# Altium PCB imx6ul.PcbDoc
Units mil, origin at the board's own origin, x right, y up, seen from the top; angles counter-clockwise.
Board outline 6000 x 4000 mil, 2 copper layers (Top Layer, Bottom Layer); 184 components, 209 nets, 602 pads, 0 vias.
Unrouted connection lines stored in the file: 404.
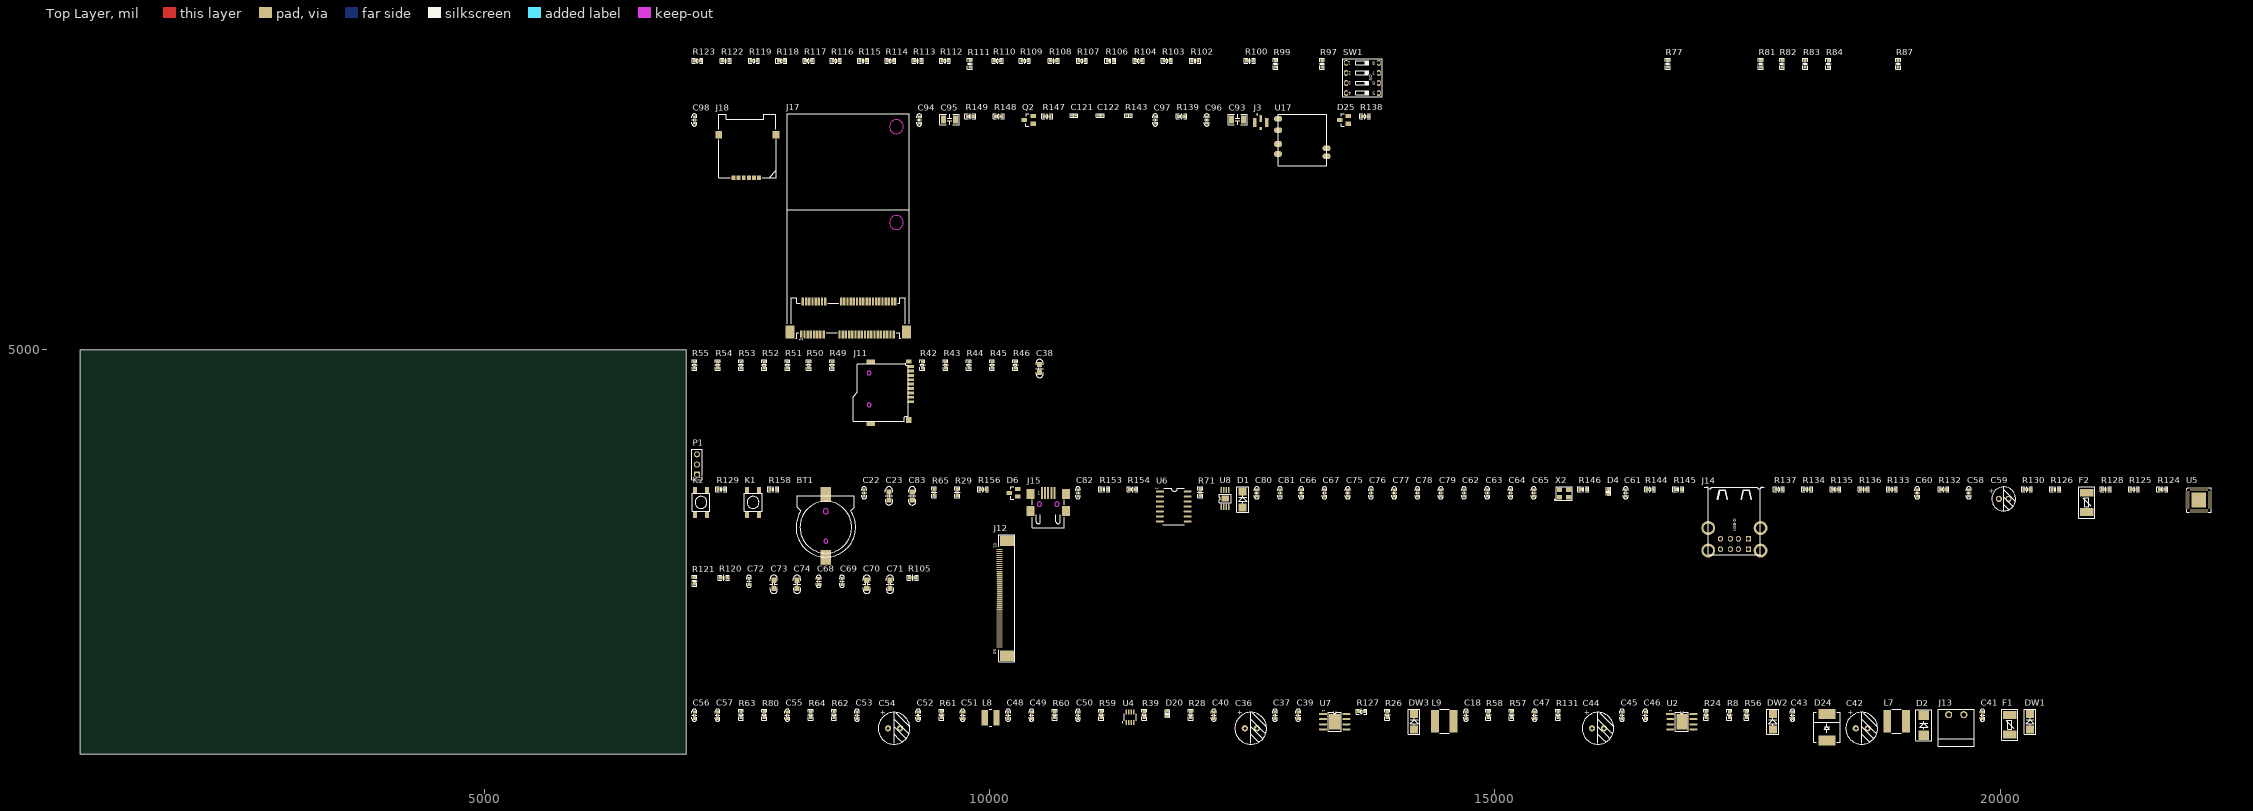
[diagram p0: Top Layer view]
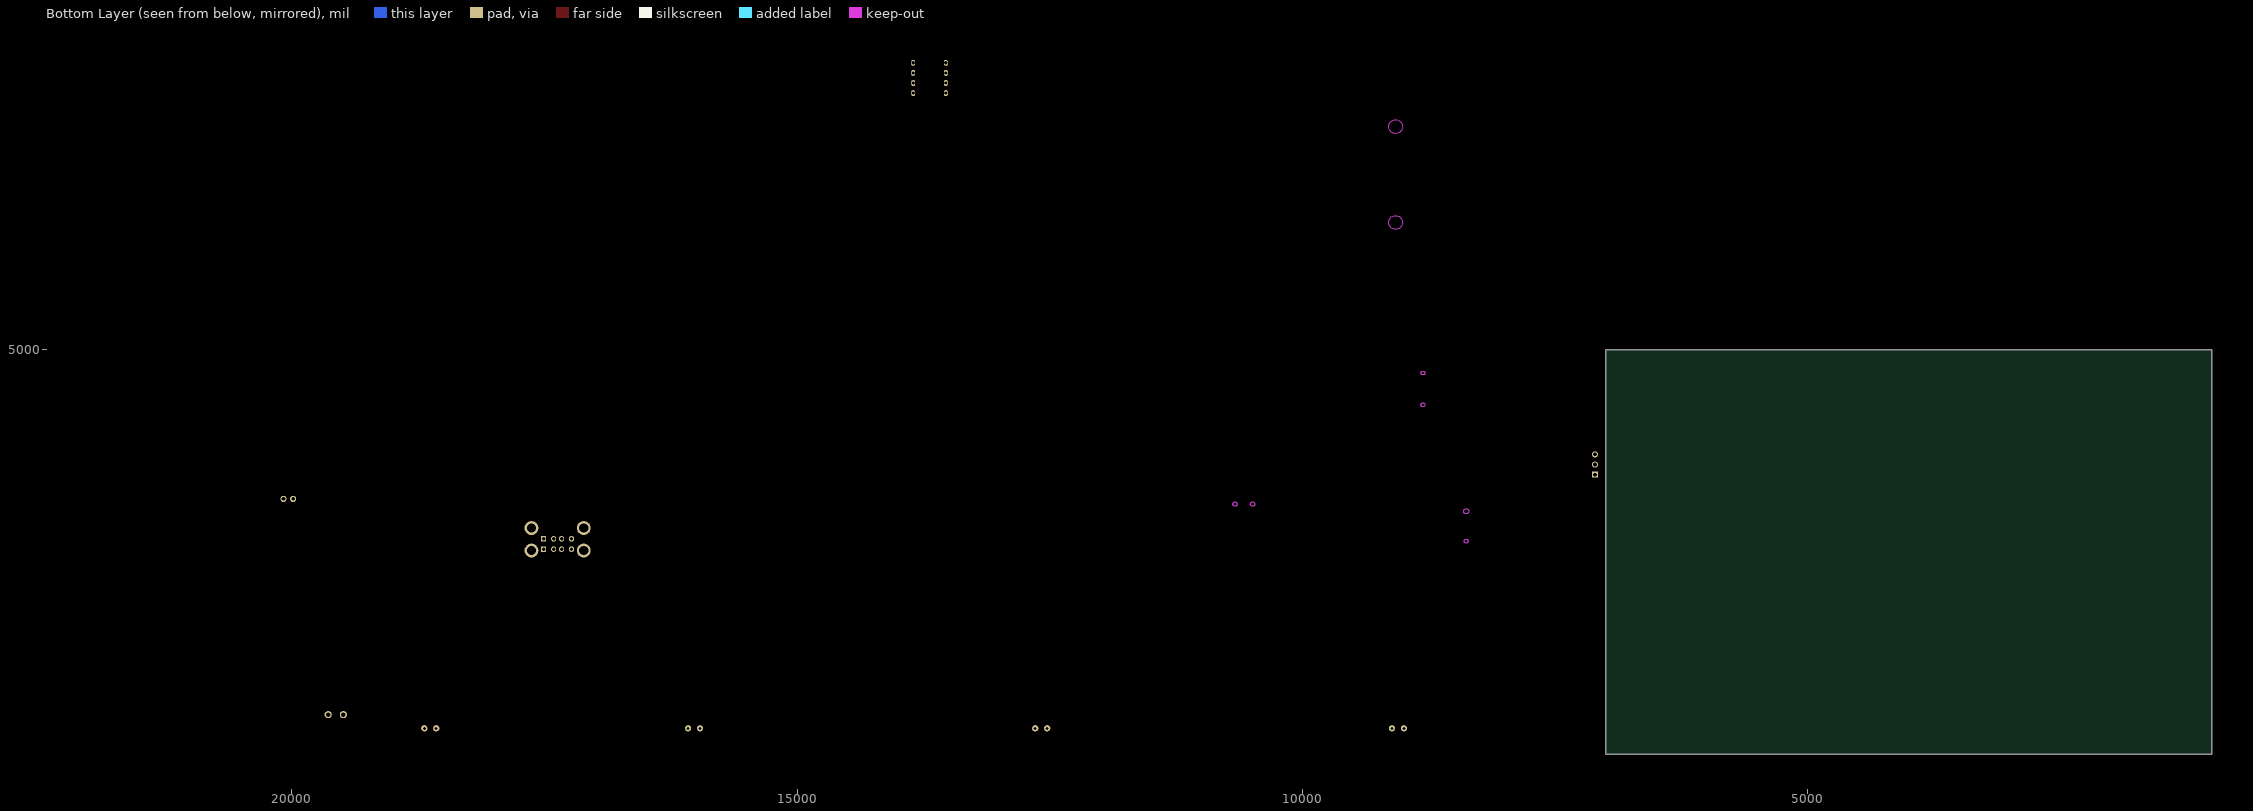
[diagram p1: Bottom Layer view, seen from below]

## Layer stack, top to bottom
Top Layer: signal copper 1.4
Dielectric: dielectric 12.6, FR-4, Dk 4.8
Bottom Layer: signal copper 1.4

## Board outline
1000,1000 7000,1000 7000,5000 1000,5000

## Design rules (kind name [scope] priority, off if disabled: settings)
Clearance [All] p1: gap=10
ComponentClearance [All] p1: gap=10 collisioncheckmode=3 verticalgap=10
DiffPairsRouting [All] p1: maxlimit=10 minlimit=10 mostfreqgap=10 maxuncoupledlength=500
PolygonConnect [All] p1: connectstyle=Relief reliefconductorwidth=10 reliefentries=4 polygonreliefangle="90 Angle"
RoomDefinition 2.POWER [InComponentClass('2.POWER')] p1: confinementstyle=ConfineIn formatcopy=TRUE lockcomponents=FALSE outline 7045,1065 20400,1065 20400,1555 7045,1555
RoomDefinition 4.CAMERA-RGB [InComponentClass('4.CAMERA-RGB')] p2: confinementstyle=ConfineIn formatcopy=TRUE lockcomponents=FALSE outline 7045,1505 9695,1505 9695,2880 7045,2880
RoomDefinition 5.USB-RTC-RST [InComponentClass('5.USB-RTC-RST')] p3: confinementstyle=ConfineIn formatcopy=TRUE lockcomponents=FALSE outline 7045,2860 22105,2860 22105,3755 7045,3755
RoomDefinition 6.232-485-CAN-DB [InComponentClass('6.232-485-CAN-DB')] p4: confinementstyle=ConfineIn formatcopy=TRUE lockcomponents=FALSE outline 7045,3705 7165,3705 7165,4125 7045,4125
RoomDefinition 7.AUDIO-TFCARD [InComponentClass('7.AUDIO-TFCARD')] p5: confinementstyle=ConfineIn formatcopy=TRUE lockcomponents=FALSE outline 7045,4175 20810,4175 20810,5015 7045,5015
RoomDefinition 8.PCIE-WIFI [InComponentClass('8.PCIE-WIFI')] p6: confinementstyle=ConfineIn formatcopy=TRUE lockcomponents=FALSE outline 7045,5065 13895,5065 13895,7445 7045,7445
RoomDefinition 9.BOOT [InComponentClass('9.BOOT')] p7: confinementstyle=ConfineIn formatcopy=TRUE lockcomponents=FALSE outline 7045,7490 19380,7490 19380,7995 7045,7995
RoomDefinition 1.CONNECTOR [InComponentClass('1.CONNECTOR')] p8: confinementstyle=ConfineIn formatcopy=TRUE lockcomponents=FALSE outline 0,0 2000,0 2000,1000 0,1000
RoutingVias [All] p1: holewidth=28 width=50 viastyle="Through Hole" minholewidth=28 minwidth=50 maxholewidth=28 maxwidth=50
SolderMaskExpansion [All] p1: expansion=4
TestPointUsage [All] p1: valid=0 allowmultiple=FALSE
Testpoint [All] p1: side=15 testpointundercomponent=TRUE minsize=40 maxsize=100 preferedsize=60 minholesize=0 maxholesize=40 preferedholesize=32 testpointgrid=1 style=1023 order=0123456789
Width [All] p1: maxlimit=10 minlimit=10 preferedwidth=10
17 further rules are at their usual default settings.

## Classes and differential pairs
component class 7.AUDIO-TFCARD: C38 J11 R42 R43 R44 R45 R46 R49 R50 R51 R52 R53 R54 R55
component class 9.BOOT: R77 R81 R82 R83 R84 R87 R97 R99 R100 R102 R103 R104 R106 R107 R108 R109 R110 R111 R112 R113 R114 R115 R116 R117 R118 R119 R122 R123 SW1
component class 8.PCIE-WIFI: C93 C94 C95 C96 C97 C98 C121 C122 D25 J3 J17 J18 Q2 R138 R139 R143 R147 R148 R149 U17
component class 6.232-485-CAN-DB: P1
component class 5.USB-RTC-RST: BT1 C22 C23 C58 C59 C60 C61 C62 C63 C64 C65 C66 C67 C75 C76 C77 C78 C79 C80 C81 C82 C83 D1 D4 D6 F2 J14 J15 K1 K2 R29 R65 R71 R124 R125 R126 R128 R129 R130 R132 R133 R134 R135 R136 R137 R144 R145 R146 R153 R154 R156 R158 U5 U6 U8 X2
component class 4.CAMERA-RGB: C68 C69 C70 C71 C72 C73 C74 J12 R105 R120 R121
component class 2.POWER: C18 C36 C37 C39 C40 C41 C42 C43 C44 C45 C46 C47 C48 C49 C50 C51 C52 C53 C54 C55 C56 C57 D2 D20 D24 DW1 DW2 DW3 F1 J13 L7 L8 L9 R8 R24 R26 R28 R39 R56 R57 R58 R59 R60 R61 R62 R63 R64 R80 R127 R131 U2 U4 U7
component class 1.CONNECTOR: J1
differential pair USB_PORT4: +USB_PORT4_P -USB_PORT4_N
differential pair USB_PORT3: +USB_PORT3_P -USB_PORT3_N
differential pair USB_PORT2: +USB_PORT2_P -USB_PORT2_N
differential pair USB_PORT1: +USB_PORT1_P -USB_PORT1_N
differential pair USB_OTG: +USB_OTG_P -USB_OTG_N
differential pair USB_OTG2: +USB_OTG2_P -USB_OTG2_N

## Components (designator, comment, footprint, x,y, rotation, side; value= is the part's Value field where it differs from the comment)
BT1 "" CR1220 8380,3245 r90 top
C18 "0.01uF" 0603C 14715,1385 r0 top
C22 "0.1uF" 0603C 8760,3585 r0 top
C23 "22uF" 0805C 9005,3595 r0 top
C36 "470uF/16V" RAD-3/8 12585,1255 r0 top
C37 "0.01uF" 0603C 12825,1385 r0 top
C38 "22uF" 0805C 10495,4855 r0 top
C39 "0.1uF" 0603C 13055,1385 r0 top
C40 "0.01uF" 0603C 12220,1385 r0 top
C41 "0.01uF" 0603C 19825,1385 r0 top
C42 "100uF/50V" RAD-3/8 18630,1255 r0 top
C43 "0.1uF" 0603C 17945,1385 r0 top
C44 "470uF/16V" RAD-3/8 16020,1255 r0 top
C45 "0.01uF" 0603C 16260,1385 r0 top
C46 "0.1uF" 0603C 16490,1385 r0 top
C47 "0.01uF" 0603C 15395,1385 r0 top
C48 "10uF" 0603C 10185,1385 r0 top
C49 "0.1uF" 0603C 10415,1385 r0 top
C50 "0.1uF" 0603C 10875,1385 r0 top
C51 "0.01uF" 0603C 9735,1385 r0 top
C52 "10pF" 0603C 9295,1385 r0 top
C53 "0.1uF" 0603C 8690,1385 r0 top
C54 "470uF/16V" RAD-3/8 9055,1255 r0 top
C55 "0.1uF" 0603C 8000,1385 r0 top
C56 "0.1uF" 0603C 7080,1385 r0 top
C57 "0.1uF" 0603C 7310,1385 r0 top
C58 "0.1uF" 0603C 19690,3585 r0 top
C59 "220uF/16V" RAD-3/6 20035,3525 r0 top
C60 "0.1uF" 0603C 19180,3585 r0 top
C61 "0.1uF" 0603C 16295,3585 r0 top
C62 "4.7uF" 0603C 14695,3585 r0 top
C63 "0.1uF" 0603C 14925,3585 r0 top
C64 "4.7uF" 0603C 15155,3585 r0 top
C65 "0.1uF" 0603C 15385,3585 r0 top
C66 "18pF" 0603C 13085,3585 r0 top
C67 "18pF" 0603C 13315,3585 r0 top
C68 "22pF" 0603C 8310,2710 r0 top
C69 "0.1uF" 0603C 8540,2710 r0 top
C70 "22uF" 0805C 8785,2720 r0 top
C71 "22uF" 0805C 9015,2720 r0 top
C72 "0.1uF" 0603C 7620,2710 r0 top
C73 "22uF" 0805C 7865,2720 r0 top
C74 "22uF" 0805C 8095,2720 r0 top
C75 "0.1uF" 0603C 13545,3585 r0 top
C76 "0.1uF" 0603C 13775,3585 r0 top
C77 "0.1uF" 0603C 14005,3585 r0 top
C78 "0.1uF" 0603C 14235,3585 r0 top
C79 "4.7uF" 0603C 14465,3585 r0 top
C80 "1uF" 0603C 12645,3585 r0 top
C81 "1uF" 0603C 12875,3585 r0 top
C82 "0.1uF" 0603C 10875,3585 r0 top
C83 "22uF" 0805C 9235,3595 r0 top
C93 "47uF/NC" 1206C 12395,7280 r0 top
C94 "0.1uF" 0603C 9305,7275 r0 top
C95 "47uF" 1206C 9545,7280 r0 top
C96 "0.1uF/NC" 0603C 12150,7275 r0 top
C97 "1uF/NC" 0603C 11640,7275 r0 top
C98 "0.1uF" 0603C 7080,7275 r0 top
C121 "10PF(NC)" 0402C 10835,7320 r90 top
C122 "10PF(NC)" 0402C 11095,7320 r90 top
D1 "SS24(NC)" SMA 12505,3520 r90 top
D2 "SMBJ30CA" SMBJ 19245,1385 r90 top
D4 "发光二极管" 0603D 16125,3600 r0 top
D6 "BAT54C" SOT-23 10295,3625 r0 top
D20 "发光二极管" 0603D 11760,1400 r0 top
D24 "SMLJ60S6" DO214AB_SM 18285,1265 r0 top
D25 "APM2301CA/NC" SOT-23 13565,7315 r0 top
DW1 "SS24" SMA 20295,1320 r90 top
DW2 "SS24" SMA 17750,1320 r90 top
DW3 "SS24" SMA 14200,1320 r90 top
F1 "2A FUSE" 1812F 20095,1195 r90 top
F2 "1A  FUSE" 1812F 20855,3395 r90 top
J3 "IPEX/NC" IPEX 12685,7290 r0 top
J11 "TF-CAD" TF-CARD 9150,4545 r0 top
J12 "FPC50" FPC50-0.5-UP 10100,2060 r90 top
J13 "CON2X1" "IDC2X1 3.81" 19565,1245 r0 top
J14 "USB-D" USB-D 17370,3125 r0 top
J15 "USB_AB" USB-AB 10580,3495 r0 top
J17 "Mini PCI Express" MINI-PCIE 8110,5315 r0 top
J18 "MICRO-SIM" MACRO-SIM 7320,7130 r0 top
K1 "按键" SS-SPB-4.5 7660,3490 r90 top
K2 "按键" SS-SPB-4.5 7145,3490 r90 top
L7 "15uH" SDS606028S 18975,1325 r0 top
L8 "2.2uH" SDRH0420 10010,1360 r0 top
L9 "15uH" SDS606028S 14500,1325 r0 top
P1 "Header 3" HDR1X3 7105,3765 r90 top
Q2 "9013/NC" SOT-23 10445,7315 r0 top
R8 "0R" 0603R 17320,1390 r0 top
R24 "0R/NC" 0603R 17090,1390 r0 top
R26 "44.2K 1%" 0603R 13935,1390 r0 top
R28 "10K 1%" 0603R 11990,1390 r0 top
R29 "0R" 0603R 9680,3590 r0 top
R39 "10K" 0603R 11530,1390 r0 top
R42 "10K" 0603R 9335,4850 r0 top
R43 "10K" 0603R 9565,4850 r0 top
R44 "10K" 0603R 9795,4850 r0 top
R45 "10K" 0603R 10025,4850 r0 top
R46 "10K" 0603R 10255,4850 r0 top
R49 "22R" 0603R 8440,4850 r0 top
R50 "22R" 0603R 8210,4850 r0 top
R51 "22R" 0603R 8000,4850 r0 top
R52 "22R" 0603R 7770,4850 r0 top
R53 "10K" 0603R 7540,4850 r0 top
R54 "22R" 0603R 7310,4850 r0 top
R55 "22R" 0603R 7080,4850 r0 top
R56 "51.1K 1%" 0603R 17490,1390 r0 top
R57 "10K 1%" 0603R 15165,1390 r0 top
R58 "10K" 0603R 14935,1390 r0 top
R59 "20R" 0603R 11105,1390 r0 top
R60 "100K" 0603R 10645,1390 r0 top
R61 "40.2K 1%" 0603R 9525,1390 r0 top
R62 "24K 1%" 0603R 8460,1390 r0 top
R63 "13K 1%" 0603R 7540,1390 r0 top
R64 "0R/NC" 0603R 8230,1390 r0 top
R65 "0R" 0603R 9450,3590 r0 top
R71 "10K(NC)" 0603R 12085,3590 r0 top
R77 "10K" 0603R 16710,7830 r0 top
R80 "0R/NC" 0603R 7770,1390 r0 top
R81 "1K" 0603R 17630,7830 r0 top
R82 "1K" 0603R 17840,7830 r0 top
R83 "1K" 0603R 18070,7830 r0 top
R84 "1K" 0603R 18300,7830 r0 top
R87 "1K" 0603R 18990,7830 r0 top
R97 "10K" 0603R 13290,7830 r0 top
R99 "10K" 0603R 12830,7830 r0 top
R100 "10K" 0603R 12575,7860 r90 top
R102 "10K" 0603R 12035,7860 r90 top
R103 "10K" 0603R 11755,7860 r90 top
R104 "10K" 0603R 11475,7860 r90 top
R105 "22R" 0603R 9240,2745 r90 top
R106 "10K" 0603R 11195,7860 r90 top
R107 "10K" 0603R 10915,7860 r90 top
R108 "10K" 0603R 10635,7860 r90 top
R109 "10K" 0603R 10350,7860 r90 top
R110 "10K" 0603R 10080,7860 r90 top
R111 "10K" 0603R 9805,7830 r0 top
R112 "10K" 0603R 9560,7860 r90 top
R113 "10K" 0603R 9290,7860 r90 top
R114 "10K" 0603R 9020,7860 r90 top
R115 "10K" 0603R 8750,7860 r90 top
R116 "10K" 0603R 8480,7860 r90 top
R117 "10K" 0603R 8210,7860 r90 top
R118 "10K" 0603R 7940,7860 r90 top
R119 "10K" 0603R 7670,7860 r90 top
R120 "0R/NC" 0603R 7370,2745 r90 top
R121 "0R/NC" 0603R 7080,2715 r0 top
R122 "10K" 0603R 7390,7860 r90 top
R123 "10K" 0603R 7110,7860 r90 top
R124 "0R" 0603R 21605,3620 r90 top
R125 "10K" 0603R 21325,3620 r90 top
R126 "0R" 0603R 20545,3620 r90 top
R127 "1K" 0603R 13680,1420 r90 top
R128 "10K" 0603R 21045,3620 r90 top
R129 "510R" 0603R 7345,3620 r90 top
R130 "10K" 0603R 20265,3620 r90 top
R131 "10K" 0603R 15625,1390 r0 top
R132 "10K" 0603R 19440,3620 r90 top
R133 "100K" 0603R 18930,3620 r90 top
R134 "100K" 0603R 18090,3620 r90 top
R135 "100K" 0603R 18370,3620 r90 top
R136 "100K" 0603R 18650,3620 r90 top
R137 "12K 1%" 0603R 17810,3620 r90 top
R138 "0R(NC)" 0603R 13715,7310 r90 top
R139 "10K/NC" 0603R 11900,7310 r90 top
R143 "0R(NC)" 0402R 11375,7320 r90 top
R144 "1K" 0603R 16535,3620 r90 top
R145 "100K" 0603R 16815,3620 r90 top
R146 "1M" 0603R 15875,3620 r90 top
R147 "1K/NC" 0603R 10570,7310 r90 top
R148 "2K/NC" 0603R 10090,7310 r90 top
R149 "4.7K/NC" 0603R 9810,7310 r90 top
R153 "10K" 0603R 11135,3620 r90 top
R154 "10K" 0603R 11415,3620 r90 top
R156 "0R(NC)" 0603R 9935,3620 r90 top
R158 "510R" 0603R 7860,3620 r90 top
SW1 "DHN-04" SW-4P 13690,7690 r0 top
U2 "ACT4070BYH" SOIC8DN-1.27 16735,1395 r0 top
U4 "MP1498DJ" TSOT23-8 11390,1365 r0 top
U5 "USB2514BI" QFN-36 21965,3515 r0 top
U6 "RX8025-SA" SOP14-1.27 11685,3600 r0 top
U7 "ACT4070BYH" SOIC8DN-1.27 13300,1395 r0 top
U8 "TPS2061DGN(NC)" MSOP-8 12330,3530 r90 top
U17 "RTL8188EUS/NC" "RTL8188EUS 13*12.2" 13335,6820 r0 top
X2 "24M" OSC4-3225 15640,3540 r0 top

## Footprints (in the part's own frame and the unit in brackets; to place one, negate y for a bottom-side part, rotate by r counter-clockwise, add the part's x,y. Pads: shape width x height; smd on the part's side, far side on the other; paste and mask are expansions set on the pad)
0402C [mm]
  rect 0.53x0.55 smd: 1(0,0.5) 2(0,-0.5)
  silkscreen extent -0.46,-0.97 0.46,0.97
0402R [mm]
  rect 0.53x0.55 smd: 1(0,0.5) 2(0,-0.5)
  silkscreen extent -0.46,-0.97 0.46,0.97
0603C [mil]
  rect 31.5x30 smd: 1(-1.02,29.52) 2(-1.02,-30.48)
  silkscreen extent -25,-61 23,60
0603D [mil]
  rect 35.43x30 smd: A(0,-30) K(0,30)
  silkscreen extent -24,-40 24,39
0603R [mil]
  rect 31.5x30 smd: 1(0.04,30.32) 2(0.04,-29.68)
  silkscreen extent -28,-53 28,54
0805C [mil]
  rect 50x50 smd: 1(0,0) 2(0,-80)
  silkscreen extent -39,-131 35,51
1206C [mm]
  rect 1.2x2 smd: 1(0,0) 2(3,0)
  silkscreen extent -0.9,-1.3 3.9,1.3
1812F [mm]
  rect 2x3.4 smd: 1(0,0) 2(4.85,0)
  silkscreen extent -1.5,-2.03 6.35,2.03
CR1220 [mm]
  rect 3.8x2.6 smd: 1(8.23,0) 2(-7.57,0)
  Keep-Out Layer circle w0.1: c4,0 r0.65
  Keep-Out Layer circle w0.1: c-3.5,0 r0.5
  silkscreen extent -7.5,-7.5 7.94,7.5
DO214AB_SM [mil]
  rect 170x100 smd: A(0,-130) C(0,130)
  silkscreen extent -130,-147 130,147
FPC50-0.5-UP [mm]
  oval 0.3x1.5 smd: 1(24.5,0) 2(24,0) 3(23.5,0) 4(23,0) 5(22.5,0) 6(22,0) 7(21.5,0) 8(21,0) 9(20.5,0) 10(20,0) 11(19.5,0) 12(19,0) 13(18.5,0) 14(18,0) 15(17.5,0) 16(17,0) 17(16.5,0) 18(16,0) 19(15.5,0) 20(15,0) 21(14.5,0) 22(14,0) 23(13.5,0) 24(13,0) 25(12.5,0) 26(12,0) 27(11.5,0) 28(11,0) 29(10.5,0) 30(10,0) 31(9.5,0) 32(9,0) 33(8.5,0) 34(8,0) 35(7.5,0) 36(7,0) 37(6.5,0) 38(6,0) 39(5.5,0) 40(5,0) 41(4.5,0) 42(4,0) 43(3.5,0) 44(3,0) 45(2.5,0) 46(2,0) 47(1.5,0) 48(1,0) 49(0.5,0)
  rect 0.3x1.5 smd: 50(0,0)
  rect 2.7x3.5 smd: BO1(-2.2,-1.825) BO2(26.7,-1.812)
  silkscreen extent -3.7,-3.82 28.2,0.18
HDR1X3 [mm] "Connector; Header; 3 Position"
  rect 1.5x1.5 hole 0.9: 1(0,0)
  round 1.5 hole 0.9: 2(2.54,0) 3(5.08,0)
  silkscreen extent -1.27,-1.27 6.35,1.27
"IDC2X1 3.81" [mm]
  round 1.8 hole 1.1: 1(-1.905,3.683) 2(1.905,3.683)
  silkscreen extent -4.56,-4.32 4.56,4.98
IPEX [mm]
  rect 0.6x1.8 smd: 1(0,0)
  rect 0.9x2.2 smd: 2(-1.5,-1) 3(1.5,-1)
  rect 0.6x0.8 smd: 4(0,-2.5)
  silkscreen extent -0.99,0.89 -0.79,1.09
MACRO-SIM [mm]
  rect 1x1.2 smd: 1(3.75,-10.86) 2(5.02,-10.86) 3(6.29,-10.86) 4(7.56,-10.86) 5(8.83,-10.86) 6(10.1,-10.86)
  rect 1.7x1.9 smd: ""(0,-0.01) ""(14.4,-0.01)
  silkscreen extent 0,-10.86 14.43,5.1
MINI-PCIE [mm]
  rect 0.6x2 smd: 1(0.7,-4.1) 2(1.1,4.1) 3(1.5,-4.1) 4(1.9,4.1) 5(2.3,-4.1) 6(2.7,4.1) 7(3.1,-4.1) 8(3.5,4.1) 9(3.9,-4.1) 10(4.3,4.1) 11(4.7,-4.1) 12(5.1,4.1) 13(5.5,-4.1) 14(5.9,4.1) 15(6.3,-4.1) 16(6.7,4.1) 17(10.3,-4.1) 18(10.7,4.1) 19(11.1,-4.1) 20(11.5,4.1) 21(11.9,-4.1) 22(12.3,4.1) 23(12.7,-4.1) 24(13.1,4.1) 25(13.5,-4.1) 26(13.9,4.1) 27(14.3,-4.1) 28(14.7,4.1) 29(15.1,-4.1) 30(15.5,4.1) 31(15.9,-4.1) 32(16.3,4.1) 33(16.7,-4.1) 34(17.1,4.1) 35(17.5,-4.1) 36(17.9,4.1) 37(18.3,-4.1) 38(18.7,4.1) 39(19.1,-4.1) 40(19.5,4.1) 41(19.9,-4.1) 42(20.3,4.1) 43(20.7,-4.1) 44(21.1,4.1) 45(21.5,-4.1) 46(21.9,4.1) 47(22.3,-4.1) 48(22.7,4.1) 49(23.1,-4.1) 50(23.5,4.1) 51(23.9,-4.1) 52(24.3,4.1)
  rect 2.3x3.2 smd: 53(-2.15,-3.5) 54(27.15,-3.5)
  rrect70% 0x0 hole 1.6: 55(0,0)
  rrect70% 0x0 hole 1.1: 56(25,0)
  Keep-Out Layer circle w0.203: c24.6,48.1 r1.75
  Keep-Out Layer circle w0.203: c24.6,24 r1.75
  silkscreen extent -2.8,-5.1 27.8,51.3
MSOP-8 [mm]
  rect 1.6x0.4 smd: 1(-2.1,0.975) 2(-2.1,0.325) 3(-2.1,-0.325) 4(-2.1,-0.975) 5(2.1,-0.975) 6(2.1,-0.325) 7(2.1,0.325) 8(2.1,0.975)
  rect 1.57x1.89 smd: 9(0,0)
  silkscreen extent -1.1,-1.5 1.1,1.5
OSC4-3225 [mm]
  rect 1.3x1.1 smd: 1(0,0) 2(2.3,0) 3(2.3,1.9) 4(0,1.9)
  silkscreen extent -1.29,-0.76 3.17,2.67
QFN-36 [mm]
  rect 1x0.28 smd: 1(-2.777,2) 2(-2.777,1.5) 3(-2.777,1) 4(-2.777,0.5) 5(-2.777,0) 6(-2.777,-0.5) 7(-2.777,-1) 8(-2.777,-1.5) 9(-2.777,-2) 19(2.823,-2) 20(2.823,-1.5) 21(2.823,-1) 22(2.823,-0.5) 23(2.823,0) 24(2.823,0.5) 25(2.823,1) 26(2.823,1.5) 27(2.823,2)
  rect 0.28x1 smd: 10(-1.977,-2.8) 11(-1.477,-2.8) 12(-0.977,-2.8) 13(-0.477,-2.8) 14(0.023,-2.8) 15(0.523,-2.8) 16(1.023,-2.8) 17(1.523,-2.8) 18(2.023,-2.8) 28(2.023,2.8) 29(1.523,2.8) 30(1.023,2.8) 31(0.523,2.8) 32(0.023,2.8) 33(-0.477,2.8) 34(-0.977,2.8) 35(-1.477,2.8) 36(-1.977,2.8)
  rect 3.7x3.7 smd: 37(0.023,0)
  silkscreen extent -3.08,-3.1 3.12,3.1
RAD-3/6 [mil]
  round 62 hole 35.43: 1(-47.24,0) 2(47.24,0)
  silkscreen extent -118,-118 118,118
RAD-3/8 [mil]
  round 62 hole 30: 1(-59,0) 2(59,0)
  silkscreen extent -157,-157 157,157
"RTL8188EUS 13*12.2" [mm]
  oct 2x1.4 smd: 1(-12.2,11.8) 2(-12.2,9) 3(-12.2,5.5) 5(0,2.4) 6(0,4.4)
  oct 2x1.5 smd: 4(-12.2,3)
  silkscreen extent -12.2,0 0,13
SDRH0420 [mm]
  rect 1.6x3.9 smd: 1(-1.5,0) 2(1.5,0)
  silkscreen extent -0.35,-2.1 0.35,2.1
SDS606028S [mm]
  rect 2x5.7 smd: 1(-2.35,0) 2(2.35,0)
  silkscreen extent -1.2,-3 1.2,3
SMA [mm]
  rect 2x2 smd: A(-2,0) K(2,0)
  silkscreen extent -3.2,-1.5 3.2,1.5
SMBJ [mm]
  rect 2.4x2.6 smd: 1(-5,0) 2(0,0)
  silkscreen extent -6.4,-2 1.4,2
SOIC8DN-1.27 [mm]
  rect 2.8x3.82 smd: 0(2.925,-1.905)
  rect 2x0.5 smd: 1(0,0)
  oval 2x0.5 smd: 2(0,-1.27) 3(0,-2.54) 4(0,-3.81) 5(5.85,-3.81) 6(5.85,-2.54) 7(5.85,-1.27) 8(5.85,0)
  silkscreen extent 1.31,-4.29 4.54,0.55
SOP14-1.27 [mm]
  rect 2x0.5 smd: 1(0,0)
  oval 2x0.5 smd: 2(0,-1.27) 3(0,-2.54) 4(0,-3.81) 5(0,-5.08) 6(0,-6.35) 7(0,-7.62) 8(7,-7.62) 9(7,-6.35) 10(7,-5.08) 11(7,-3.81) 12(7,-2.54) 13(7,-1.27) 14(7,0)
  silkscreen extent 0.76,-8.38 6.1,0.76
SOT-23 [mil]
  rect 55x40 smd: 1(-14.05,-78.06) 2(-14.05,-2.06) 3(-101.05,-41.06)
  silkscreen extent -85,-101 -56,20
SS-SPB-4.5 [mm]
  rect 1.5x1 smd: 1(-3.15,1.5) 2(3.15,1.5) 3(3.15,-1.5) 4(-3.15,-1.5)
  silkscreen extent -2.25,-2.25 2.25,2.25
SW-4P [mm]
  oval 1x1.5 / inner round 1.524 / far side oval 1x1.5 hole 0.8: 1(-4.102,3.81) 2(-4.102,1.27) 3(-4.102,-1.27) 4(-4.102,-3.81) 5(4.102,-3.81) 6(4.102,-1.27) 7(4.102,1.27) 8(4.102,3.81)
  silkscreen extent -4.95,-4.77 4.95,4.81
TF-CARD [mm]
  rect 1.6x0.7 smd: 1(1.82,-1.466) 2(1.82,-0.366) 3(1.82,0.734) 4(1.82,1.834) 5(1.82,2.934) 6(1.82,4.034) 7(1.82,5.134) 8(1.82,6.234) 9(1.82,7.334)
  rect 1.4x1 smd: 10(1.32,8.634)
  rect 2.2x1.2 smd: 11(-8.28,8.534) 12(-8.28,-6.966)
  rect 1.4x1.6 smd: 13(1.32,-6.066)
  Keep-Out Layer circle w0.203: c-8.68,5.734 r0.5
  Keep-Out Layer circle w0.203: c-8.68,-2.266 r0.5
  silkscreen extent -12.7,-6.37 1.12,8.13
TSOT23-8 [mm]
  rect 0.35x1.3 smd: 1(-0.975,-1.3) 2(-0.325,-1.3) 3(0.325,-1.3) 4(0.975,-1.3) 5(0.975,1.3) 6(0.325,1.3) 7(-0.325,1.3) 8(-0.975,1.3)
  silkscreen extent -2,-1.4 1.5,0.85
USB-AB [mm]
  rect 0.5x3 smd: 1(-1.6,2.225) 2(-0.8,2.225) 3(0,2.225) 4(0.8,2.225) 5(1.6,2.225)
  rect 2x2.5 smd: 6(-4.45,1.975) 7(-4.45,-2.225) 8(4.45,-2.225) 9(4.45,1.975)
  Keep-Out Layer circle w0.1: c2.2,-0.555 r0.55
  Keep-Out Layer circle w0.1: c-2.2,-0.555 r0.55
  silkscreen extent -4,-6.5 4,0.5
USB-D [mm]
  rect 1.27x1.4 hole 0.85: 1(3.5,-2.49) 5(3.5,0.13)
  oval 1.27x1.4 hole 0.85: 2(1,-2.49) 3(-1,-2.49) 4(-3.5,-2.49) 6(1,0.13) 7(-1,0.13) 8(-3.5,0.13)
  round 3.5 hole 2.3: 9(6.57,-2.84) 10(-6.57,-2.84) 11(6.57,2.84) 12(-6.57,2.84)
  silkscreen extent -7.55,-3.88 7.55,13.12

## Part data
BT1: library part 电池
C18 C22 C23 C37 C38 C39 C40 C41 C43 C45 C46 C47 C48 C49 C50 C51 C52 C53 C55 C56 C57 C58 C60 C61 C62 C63 C64 C65 C66 C67 C68 C69 C70 C71 C72 C73 C74 C75 C76 C77 C78 C79 C80 C81 C82 C83 C93 C94 C95 C96 C97 C98 C121 C122: library part 电容, "电容"
C36 C42 C44 C54 C59: library part 直插电解电容, "直插电解电容"
D1: library part SS24
D2: library part P6KE
D6: "SCHOTTKY DIODE"
D25: library part APM2301CA
DW1: "二极管"
DW2 DW3: library part B240A, "二极管"
F1: library part FUSE, "保险丝"
F2: library part FUSE, "贴片自恢复保险丝"
J3: library part IPEX
J12: "FPC CONNECTOR"
J14: "USB DOUBLE PORTS"
J15: "小USB插痤"
J17: library part MINIPCIE, "MPC24-52K3311"
L7 L9: library part 功率电感, "电感"
L8: library part 功率电感
P1: "Header, 3-Pin"
Q2: library part 9013
R8 R24 R26 R28 R29 R39 R42 R43 R44 R45 R46 R49 R50 R51 R52 R53 R54 R55 R56 R57 R58 R59 R60 R61 R62 R63 R64 R65 R71 R77 R80 R81 R82 R83 R84 R87 R97 R99 R100 R102 R103 R104 R105 R106 R107 R108 R109 R110 R111 R112 R113 R114 R115 R116 R117 R118 R119 R120 R121 R122 R123 R124 R125 R126 R127 R128 R129 R130 R131 R132 R133 R134 R135 R136 R137 R138 R139 R143 R144 R145 R146 R147 R148 R149 R153 R154 R156 R158: library part 电阻, "电阻"
SW1: library part SW_DIP-4_SM, "SW 4P SPST DIP 25MA 24V SMT"
U2 U7: library part MP1583DN, "电源芯片"
U4: "MP1498DJ 2A"
U5: library part USB2514, "USB2514Bi"
U6: "I2C interface RTC with crystal built-in"
U8: library part TPS2061, "TPS2061DGN"
U17: library part RTL8188EUS-13*12.2
X2: library part 表贴晶体, "4PIN表贴晶体"

## Nets (pads, with @x,y where several pads share a name; then routed paths per layer and width w, separated by ;. In a path a pad name is that pad's centre, name@x,y a point inside that pad or via, vN(x,y) a via of type N, cw(c..) or ccw(c..) an arc to the next point about the centre after c; other vN are vias at no path point)
CLK1_N: 
CLK1_P: 
CSI_DATA0: 
CSI_DATA1: 
CSI_DATA2: 
CSI_DATA3: 
CSI_DATA4: 
CSI_DATA5: 
CSI_DATA6: 
CSI_DATA7: 
CSI_HSYNC: R120.2 U6.2
CSI_MCLK: 
CSI_PIXCLK: 
CSI_VSYNC: R121.2 U6.13
DCDC_3V3: C38.2 J11.4 R42.2 R43.2 R44.2 R45.2 R46.2 R53.2 R77.2 R81.2 R82.2 R83.2 R84.2 R87.2
EARTH: J14.9 J14.10 J14.11 J14.12 J15.6 J15.7 J15.8 J15.9
ENET1_CRS_DV: 
ENET1_RXD0: 
ENET1_RXD1: 
ENET1_RXER: 
ENET1_TX_CLK: 
ENET1_TXD0: 
ENET1_TXD1: 
ENET1_TXEN: 
ENET2_CRS_DV: 
ENET2_RXD0: 
ENET2_RXD1: 
ENET2_RXER: 
ENET2_TX_CLK: 
ENET2_TXD0: 
ENET2_TXD1: 
ENET2_TXEN: 
GND: BT1.2 C22.1 C23.1 C36.2 C37.2 C38.1 C39.2 C42.2 C43.2 C44.2 C45.2 C46.2 C48.2 C49.2 C51.2 C53.2 C54.2 C55.2 C56.2 C57.2 C58.1 C59.2 C60.1 C61.1 C62.1 C63.1 C64.1 C65.1 C66.1 C67.1 C68.2 C69.2 C70.1 C71.1 C72.2 C73.1 C74.1 C75.1 C76.1 C77.1 C78.1 C79.1 C80.1 C81.1 C82.1 C83.1 C93.2 C94.2 C95.2 C96.2 C98.2 C121.2 C122.2 D2.1 D4.K D20.K DW2.A DW3.A J3.2 J3.3 J11.6 J11.10 J11.11 J11.12 J11.13 J12.3 J12.4 J12.6 J12.14 J12.23 J12.32 J12.41 J12.43 J12.46 J13.2 J14.4 J14.8 J15.5 J17.4 J17.9 J17.15 J17.18 J17.21 J17.26 J17.27 J17.29 J17.34 J17.35 J17.37 J17.40 J17.43 J17.50 J18.1 K1.1 K1.2 K2.1 K2.2 Q2.2 R28.2 R39.1 R57.2 R58.1 R63.1 R97.1 R99.1 R100.1 R102.1 R103.1 R104.1 R106.1 R107.1 R108.1 R109.1 R110.1 R111.1 R112.1 R113.1 R114.1 R115.1 R116.1 R117.1 R118.1 R119.1 R122.1 R123.1 R131.2 R134.2 R135.2 R136.2 R137.1 R145.2 R149.2 U2.0 U2.4 U4.4 U5.11 U5.37 U6.11 U7.0 U7.4 U8.1 U17.4 U17.5 X2.2 X2.4
GPIO1_0: 
GPIO1_1: J12.47
GPIO1_2: J12.49
GPIO1_3: J12.48
GPIO1_4: J12.50
GPIO1_5: R105.1
GPIO1_6: 
GPIO1_7: 
GPIO1_8: 
GPIO1_9: 
GPIO5_IO0: 
GPIO5_IO1: R24.2 R80.2
GPIO5_IO2: 
GPIO5_IO3: 
GPIO5_IO4: 
GPIO5_IO5: 
GPIO5_IO6: 
GPIO5_IO7: 
GPIO5_IO8: R148.1 R149.1
GPIO5_IO9: 
LCD_DATA0: J12.15 R97.2
LCD_DATA1: J12.16 R87.1
LCD_DATA2: J12.17 R99.2
LCD_DATA3: J12.18 R100.2
LCD_DATA4: J12.19 R84.1
LCD_DATA5: J12.20 R102.2 SW1.2
LCD_DATA6: J12.21 R103.2 SW1.3
LCD_DATA7: J12.22 R104.2 SW1.4
LCD_DATA8: J12.24 R106.2
LCD_DATA9: J12.25 R107.2
LCD_DATA10: J12.26 R108.2
LCD_DATA11: J12.27 R109.2 SW1.1
LCD_DATA12: J12.28 R110.2
LCD_DATA13: J12.29 R111.2
LCD_DATA14: J12.30 R112.2
LCD_DATA15: J12.31 R113.2
LCD_DATA16: J12.33 R114.2
LCD_DATA17: J12.34 R115.2
LCD_DATA18: J12.35 R116.2
LCD_DATA19: J12.36 R117.2
LCD_DATA20: J12.37 R118.2
LCD_DATA21: J12.38 R119.2
LCD_DATA22: J12.39 R122.2
LCD_DATA23: J12.40 R123.2
LCD_DE: J12.11
LCD_HSYNC: J12.13
LCD_PCLK: J12.42
LCD_VDD_EN: 
LCD_VSYNC: J12.12
NetBT1_1: BT1.1 D6.2
NetC18_1: C18.1 U7.1
NetC18_2: C18.2 DW3.K L9.1 U7.3
NetC40_1: C40.1 U7.6
NetC40_2: C40.2 R39.2
NetC41_1: C41.1 U2.1
NetC41_2: C41.2 DW2.K L7.1 U2.3
NetC47_1: C47.1 U2.6
NetC47_2: C47.2 R58.2
NetC50_1: C50.1 R59.1
NetC50_2: C50.2 L8.1 U4.3
NetC52_1: C52.1 R61.1 R62.1 R63.2
NetC55_1: C55.1 R60.1 R64.1 R80.1 U4.6
NetC56_1: C56.1 U4.7
NetC57_1: C57.1 U4.1
NetC61_2: C61.2 R133.2 U5.26
NetC66_2: C66.2 R146.1 U5.33 X2.1
NetC67_2: C67.2 R146.2 U5.32 X2.3
NetC68_1: C68.1 J12.5 R105.2
NetC80_2: C80.2 U5.34
NetC81_2: C81.2 U5.14
NetC96_1: C96.1 D25.3 R138.1 U17.1
NetC97_2: C97.2 D25.1 R139.1 R147.2
NetC121_1: C121.1 R143.1 U17.6
NetC122_1: C122.1 J3.1 R143.2
NetD1_K: D1.K R71.2 U8.2 U8.3
NetD2_2: D2.2 F1.2 J13.1
NetD4_A: D4.A R144.1
NetD6_3: D6.3 R156.2 U6.6
NetD20_A: D20.A R127.1
NetDW1_A: DW1.A F1.1
NetJ12_9: J12.9 R120.1
NetJ12_10: J12.10 R121.1
NetJ15_2: J15.2 R29.1
NetJ15_3: J15.3 R65.1
NetK1_3: K1.3 K1.4 R158.1
NetK2_3: K2.3 K2.4 R129.1
NetQ2_1: Q2.1 R148.2
NetQ2_3: Q2.3 R147.1
NetR8_1: R8.1 R24.1 R131.1 U2.7
NetR26_2: R26.2 R28.1 U7.5
NetR56_2: R56.2 R57.1 U2.5
NetR59_2: R59.2 U4.5
NetR62_2: R62.2 U4.8
NetR71_1: R71.1 U8.5
NetR77_1: R77.1 SW1.8
NetR81_1: R81.1 SW1.5
NetR82_1: R82.1 SW1.6
NetR83_1: R83.1 SW1.7
NetR124_1: R124.1 U5.27
NetR125_2: R125.2 U5.13
NetR128_2: R128.2 U5.17
NetR130_2: R130.2 U5.19
NetR132_2: R132.2 U5.21
NetR134_1: R134.1 U5.25
NetR135_1: R135.1 U5.24
NetR136_1: R136.1 U5.22
NetR137_2: R137.2 U5.35
NetR144_2: R144.2 R145.1 U5.28
NetR153_1: R153.1 U6.12
NetR154_1: R154.1 U6.10
NetR156_1: R156.1 U6.5
NUSB_OTG_CHD: 
ONOFF: R129.2
POR_B: R8.2 R64.2
PWRON: R158.2
SAI2_BCLK: 
SAI2_RX: 
SAI2_SYNC: 
SAI2_TX: 
SD1_CLK: R52.1
SD1_CMD: R51.1
SD1_DATA0: R54.1
SD1_DATA1: R55.1
SD1_DATA2: R49.1
SD1_DATA3: R50.1
SD1_NCD: J11.9 R53.1
SD_CLK: J11.5 R52.2
SD_CMD: J11.3 R44.1 R51.2
SD_DATA0: J11.7 R45.1 R54.2
SD_DATA1: J11.8 R46.1 R55.2
SD_DATA2: J11.1 R42.1 R49.2
SD_DATA3: J11.2 R43.1 R50.2
SPDIF_TX: 
UART1_CTS: 
UART1_RTS: 
UART1_RXD: P1.1
UART1_TXD: P1.2
UART2_CTS: 
UART2_RTS: 
UART2_RXD: 
UART2_TXD: 
UART3_CTS: 
UART3_RTS: 
UART3_RXD: 
UART3_TXD: 
UART4_RXD: 
UART4_TXD: 
UART5_RXD: 
UART5_TXD: 
UIM_CLK: J17.12 J18.6
UIM_DATA: J17.10 J18.5
UIM_PWR: C98.1 J17.8 J18.2
UIM_RESET: J17.14 J18.4
UIM_VPP: J17.16 J18.3
USB_DTG2_N: 
USB_DTG2_P: 
USB_OTG1_VBUS: C22.2 C23.2 C83.2 J15.1 U8.6 U8.7 U8.8
USB_OTG2_N: U5.30
USB_OTG2_P: U5.31
USB_OTG2_VBUS: R126.2
USB_OTG_N: R29.2
USB_OTG_P: R65.2
USB_PORT1_N: U5.1 U17.2
USB_PORT1_P: U5.2 U17.3
USB_PORT2_N: J14.2 U5.3
USB_PORT2_P: J14.3 U5.4
USB_PORT3_N: J14.6 U5.6
USB_PORT3_P: J14.7 U5.7
USB_PORT4_N: J17.36 U5.8
USB_PORT4_P: J17.38 U5.9
USBOTG1_ID: J15.4 U8.4
VBUS: C58.2 C59.1 F2.2 J14.1 J14.5
VCC3V3: C51.1 C52.2 C53.1 C54.1 C60.2 C62.2 C63.2 C64.2 C65.2 C72.1 C73.2 C74.2 C75.2 C76.2 C77.2 C78.2 C79.2 C82.2 C93.1 C94.1 C95.1 C97.1 D6.1 D25.2 J12.7 J12.8 J17.2 J17.24 J17.39 J17.41 J17.52 L8.2 R61.2 R124.2 R133.1 R138.2 R139.2 R153.2 R154.2 U5.5 U5.10 U5.15 U5.23 U5.29 U5.36
VCC5V: C44.1 C45.1 C46.1 C48.1 C49.1 C69.1 C70.2 C71.2 D1.A D24.A F2.1 J12.1 J12.2 L7.2 R56.1 R60.2 R125.1 R126.1 R128.1 R130.1 R132.1 U4.2
VCC12V: C42.1 C43.1 DW1.K U2.2 U7.2
VSYS: C36.1 C37.1 C39.1 D24.C L9.2 R26.1 R127.2
pads on no net: J3.4 J12.44 J12.45 J12.BO1 J12.BO2 J17.1 J17.3 J17.5 J17.6 J17.7 J17.11 J17.13 J17.17 J17.19 J17.20 J17.22 J17.23 J17.25 J17.28 J17.30 J17.31 J17.32 J17.33 J17.42 J17.44 J17.45 J17.46 J17.47 J17.48 J17.49 J17.51 J17.53 J17.54 J17.55 J17.56 J18. P1.3 U2.8 U5.12 U5.16 U5.18 U5.20 U6.1 U6.3 U6.4 U6.7 U6.8 U6.9 U6.14 U7.7 U7.8 U8.9

## Text inside footprints (layer, text, board x,y; h text height)
C36: Top Overlay "+" at 12454,1440 h50 r270
C42: Top Overlay "+" at 18499,1440 h50 r270
C44: Top Overlay "+" at 15889,1440 h50 r270
C54: Top Overlay "+" at 8924,1440 h50 r270
C59: Top Overlay "+" at 19893.6,3631 h50 r270
J12: Top Overlay "50" at 10035.62,2037.92 h30 r270; Top Overlay "01" at 10043.62,3086.92 h30 r270
J15: Top Overlay "1" at 10475,3567 h30
J17: Top Overlay "1" at 8157.24,5082.72 h40 r90
SW1: Top Overlay "ON" at 13755,7721 h30 r270; Top Overlay "7" at 13817,7757 h31 r180; Top Overlay "5" at 13816,7556 h31 r180; Top Overlay "8" at 13816,7852 h31 r180; Top Overlay "6" at 13816,7654 h31 r180; Top Overlay "1" at 13575,7855 h31 r180; Top Overlay "3" at 13578,7656 h31 r180; Top Overlay "4" at 13579,7552 h31 r180; Top Overlay "2" at 13580,7754 h31 r180
U2: Top Overlay "1" at 16725,1440 h30 r270
U6: Top Overlay "1" at 11643.42,3640 h30 r270
U7: Top Overlay "1" at 13290,1440 h30 r270